# EAGLE board Keyboard _Board (EAGLE 9.7.0), part 1 of 2
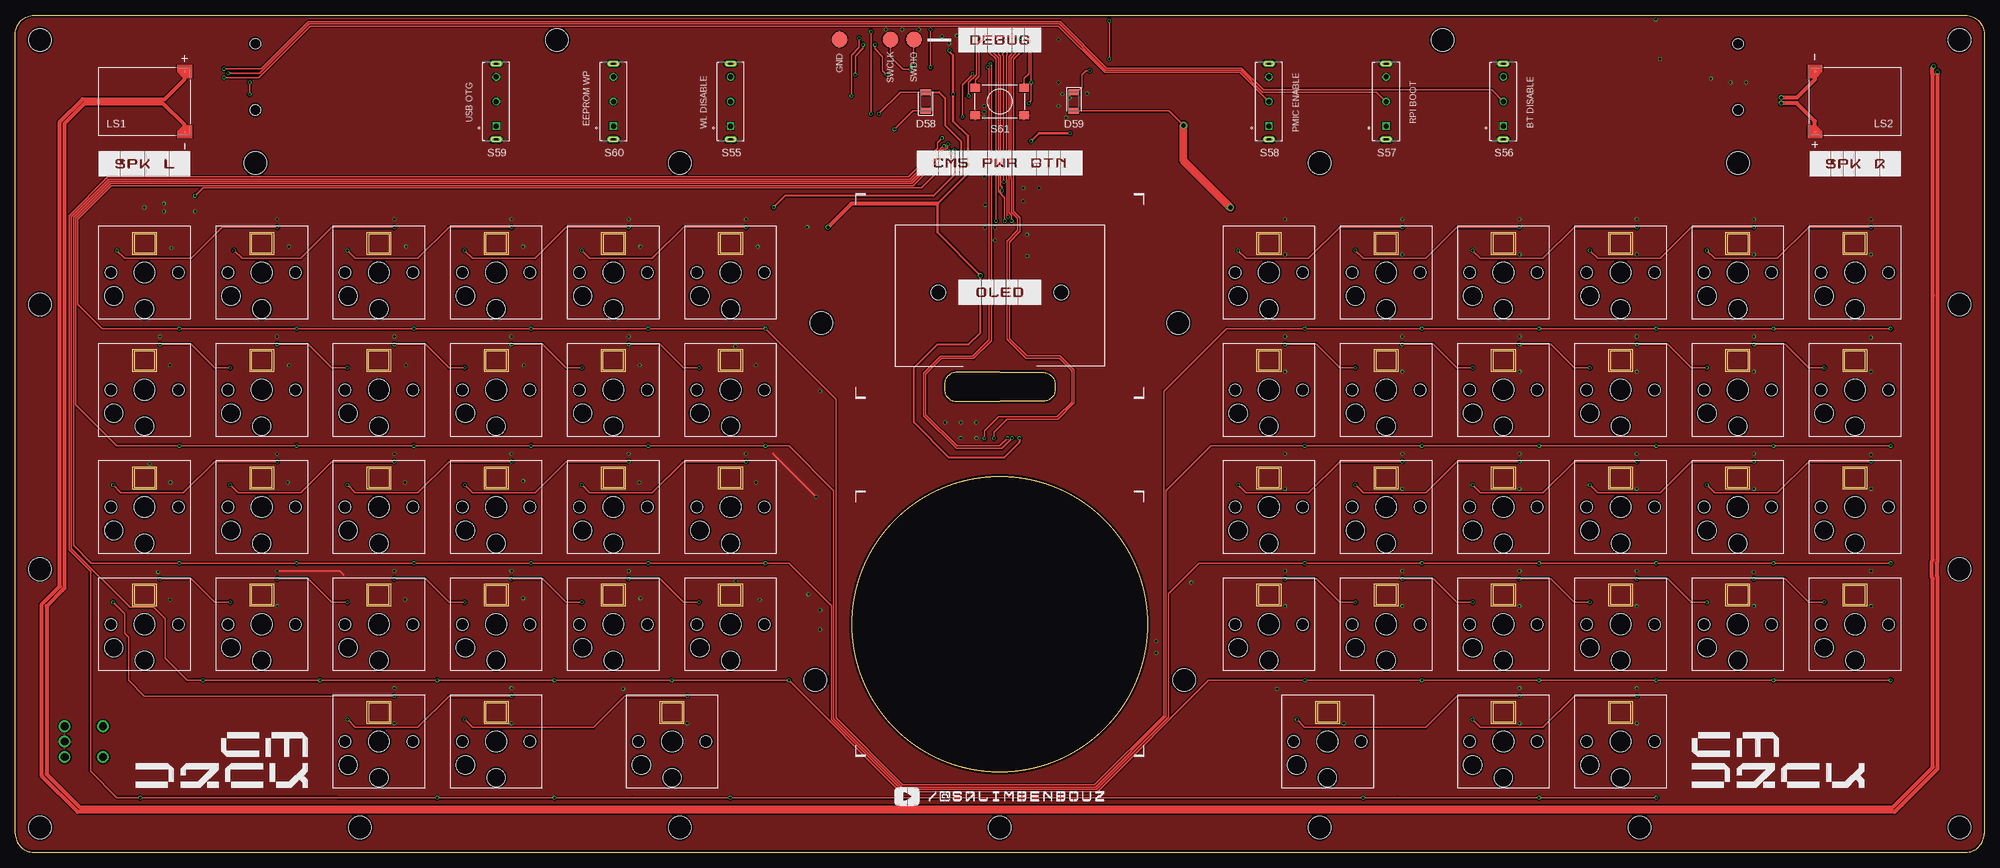
[diagram p0: board, top side]
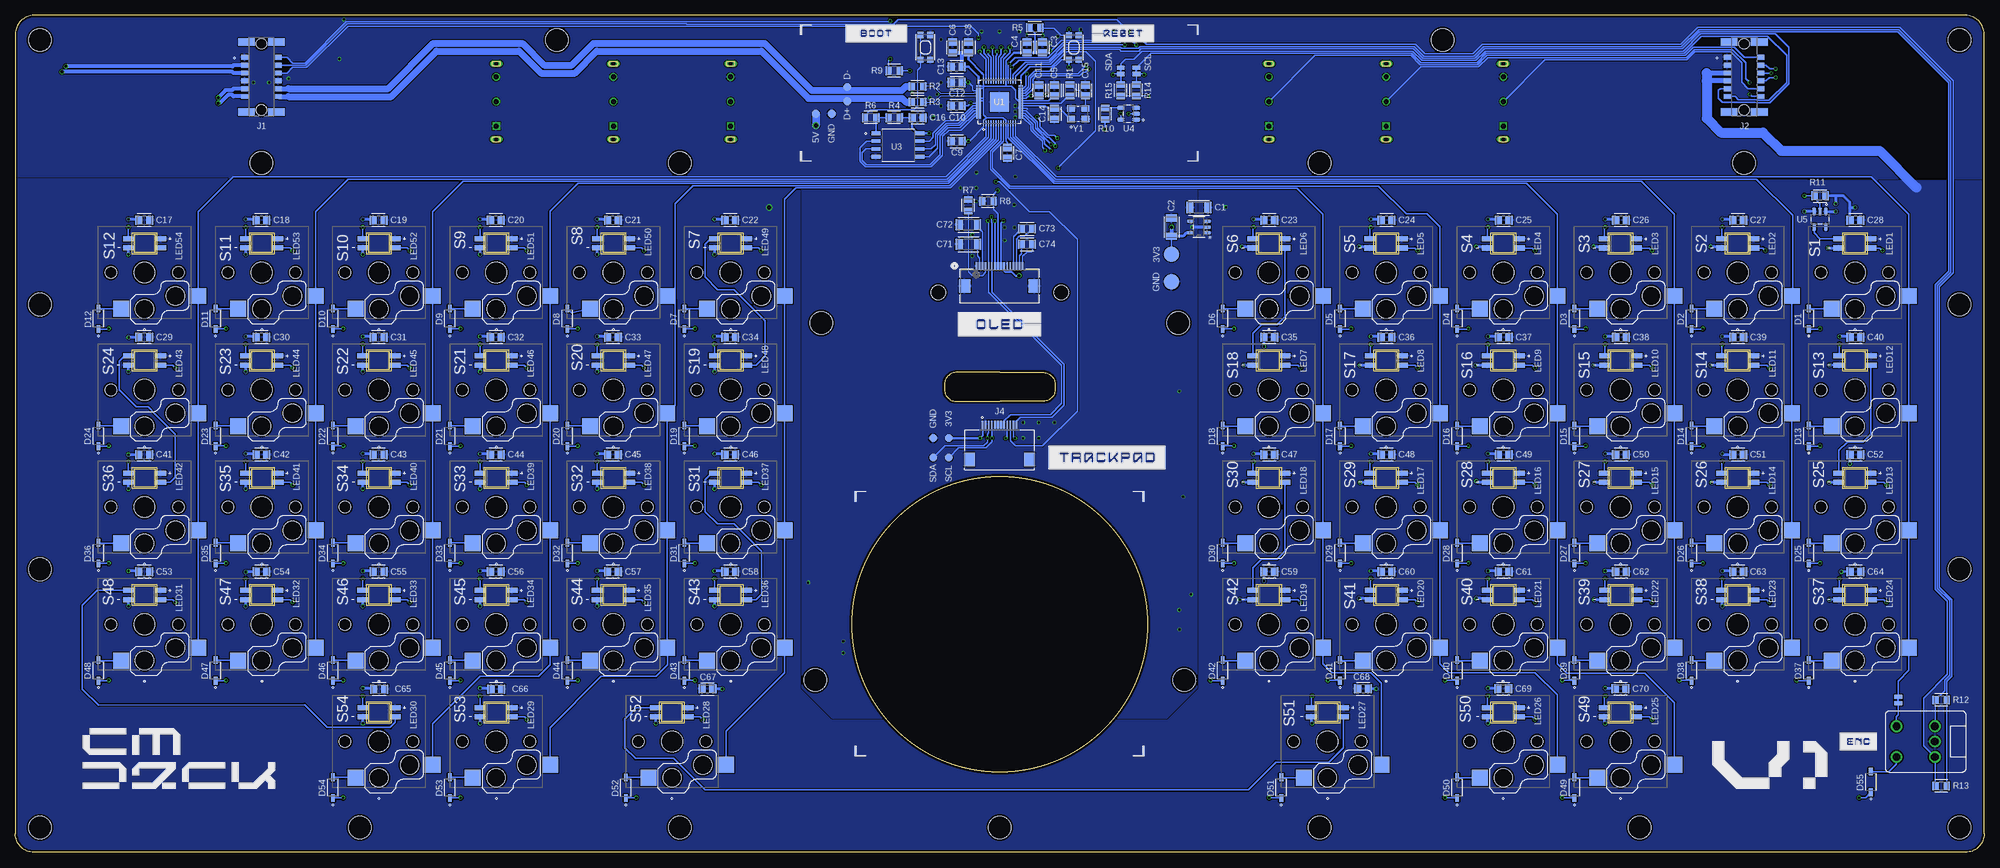
[diagram p1: board, bottom side, seen from below]

Size 320 x 136 mm. Coordinates in mm from the lower left corner, seen from the top.
Outline: 0,3 arc90 3,0 317,0 arc90 320,3 320,133 arc90 317,136 3,136 arc90 0,133 0,3
Outline: 160,78 167,78 arc-90 169,76 169,75.27 arc-90 167,73.27 160,73.27 153,73.27 arc-90 151,75.27 151,76 arc-90 153,78 160,78
Outline: circle at 160,37.05 radius 24
Copper layers (1*16): Top 0.035mm / dielectric 1.5mm / Bottom 0.035mm
Design rules "PCBWay_2L_152um-Track.dru *": minimum track width 6mil, minimum drill 0.3mm, track to track 6mil, track to pad 6mil, pad to pad 6mil, via to via 6mil, smd to smd 0mil, copper to edge 0.3mm, drill to drill 10mil, minimum pad ring 6mil, minimum via ring 0.1mm, stop-mask expansion 2mil, vias tented up to drill 999mil, thermal gap 0.2mm
Holes 3.7 mm at 4,4 316,4 160,4 130,28 131,86 108,112 39,112 108,4 56,4 4,89 4,46 212,4 264,4 190,28 189,86 212,112 280,112 316,89 316,46 88,132 232,132 4,132 316,132
Holes 2.4 mm at 170,91 150,91

## Footprints (pad centres in the part's own frame; a part is rotated, then mirrored left to right if it is on the bottom)
KMR2 = smd 1 x 1: 1 2,0.8; 2 2,-0.8; 3 -2,-0.8; 4 -2,0.8
CAPC3216X135 = smd 1.165 x 1.815: 1 -1.475,0; 2 1.475,0
CAPC2012X110 = smd 1.165 x 1.465: 1 -0.875,0; 2 0.875,0
SOD3715X135N = smd 1.21 x 0.73: A 1.68,0; C -1.68,0
LEDC3216X75N_FLAT-G = smd 0.962 x 1.712: A 1.525,0; C -1.525,0
HARWIN_M55-6001242R = smd 0.8 x 1.1: A1 -3.175,-2.75; A2 -1.905,-2.75; A3 -0.635,-2.75; A4 0.635,-2.75; A5 1.905,-2.75; A6 3.175,-2.75; B1 -3.175,2.75; B2 -1.905,2.75; B3 -0.635,2.75; B4 0.635,2.75; B5 1.905,2.75; B6 3.175,2.75 | smd 1.2 x 2.7: SH1 -5.67,-2.45; SH2 -5.67,2.45; SH3 5.67,-2.45; SH4 5.67,2.45 | hole 1.7: -5.385,0; 5.385,0
CONN16_1-1775333-6_TEC = smd 0.305 x 1.295: 1 7.5,0; 2 7,0; 3 6.5,0; 4 6,0; 5 5.5,0; 6 5,0; 7 4.5,0; 8 4,0; 9 3.5,0; 10 3,0; 11 2.5,0; 12 2,0; 13 1.5,0; 14 1,0; 15 0.5,0; 16 0,0 | smd 1.8 x 2.2: 17 -1.9,3.253; 18 9.4,3.253
AMPHENOL_F31L-1A7H1-11012 = smd 0.3 x 1.3: 1 -2.75,4.06; 2 -2.25,4.06; 3 -1.75,4.06; 4 -1.25,4.06; 5 -0.75,4.06; 6 -0.25,4.06; 7 0.25,4.06; 8 0.75,4.06; 9 1.25,4.06; 10 1.75,4.06; 11 2.25,4.06; 12 2.75,4.06 | smd 1.8 x 2.2: S1 -4.9,-1.59; S2 4.9,-1.59
SMT-JUMPER_2_NC_TRACE_NO-SILK = smd 0.66 x 1.27: 1 -0.521,0; 2 0.521,0
LED_SK6812-E = smd 1.8 x 0.82: 1 2.6,0.75; 2 2.6,-0.75; 3 -2.6,-0.75; 4 -2.6,0.75
SPKR_CMS-151135-18S-X8 = smd 0.2 x 0.2: N -4.9,-6.5; P 4.9,-6.5
RESC2012X65 = smd 1.031 x 1.42: 1 -0.919,0; 2 0.919,0
SW_5114 = smd 2.6 x 2.6: P$1 -3.8,-5.9; P$2 8.75,-3.8 | hole 3.4: 0,0 | hole 1.9: -5.5,0; 5.5,0 | hole 3: 5,-3.8; 0,-5.9
SW_SLW-1277744-3A-N-D = drill 0.8 square: 1 -4,0 | drill 0.8: 2 0,0; 3 4,0 | drill 0.7 long: SH1 -6.15,0; SH2 6.15,0
PTS645-SMT-6MM = smd 1.55 x 1.3: 1 -3.975,2.25; 2 3.975,2.25; 3 -3.975,-2.25; 4 3.975,-2.25
B2,54 = smd 2.54 x 2.54: TP 0,0
B1,27 = smd 1.27 x 1.27: TP 0,0
QFN40P700X700X90-57N = smd 0.84 x 0.2: 1 -3.435,2.6; 2 -3.435,2.2; 3 -3.435,1.8; 4 -3.435,1.4; 5 -3.435,1; 6 -3.435,0.6; 7 -3.435,0.2; 8 -3.435,-0.2; 9 -3.435,-0.6; 10 -3.435,-1; 11 -3.435,-1.4; 12 -3.435,-1.8; 13 -3.435,-2.2; 14 -3.435,-2.6; 29 3.435,-2.6; 30 3.435,-2.2; 31 3.435,-1.8; 32 3.435,-1.4; 33 3.435,-1; 34 3.435,-0.6; 35 3.435,-0.2; 36 3.435,0.2; 37 3.435,0.6; 38 3.435,1; 39 3.435,1.4; 40 3.435,1.8; 41 3.435,2.2; 42 3.435,2.6 | smd 0.2 x 0.84: 15 -2.6,-3.435; 16 -2.2,-3.435; 17 -1.8,-3.435; 18 -1.4,-3.435; 19 -1,-3.435; 20 -0.6,-3.435; 21 -0.2,-3.435; 22 0.2,-3.435; 23 0.6,-3.435; 24 1,-3.435; 25 1.4,-3.435; 26 1.8,-3.435; 27 2.2,-3.435; 28 2.6,-3.435; 43 2.6,3.435; 44 2.2,3.435; 45 1.8,3.435; 46 1.4,3.435; 47 1,3.435; 48 0.6,3.435; 49 0.2,3.435; 50 -0.2,3.435; 51 -0.6,3.435; 52 -1,3.435; 53 -1.4,3.435; 54 -1.8,3.435; 55 -2.2,3.435; 56 -2.6,3.435 | smd 3.1 x 3.1: 57 0,0
SOT_RG1_DIO = smd 1.003 x 0.508: 1 -1.353,0.95; 2 -1.353,0; 3 -1.353,-0.95; 4 1.353,-0.95; 5 1.353,0.95
SOIC127P790X216-8N = smd 1.61 x 0.58: 1 -3.605,1.905; 2 -3.605,0.635; 3 -3.605,-0.635; 4 -3.605,-1.905; 5 3.605,-1.905; 6 3.605,-0.635; 7 3.605,0.635; 8 3.605,1.905
SOT95P280X145-5N = smd 1.21 x 0.59: 1 -1.255,0.95; 2 -1.255,0; 3 -1.255,-0.95; 4 1.255,-0.95; 5 1.255,0.95
PEC09-2XXXF-SXXXX = drill 1.27: P$1 0,2.5; P$2 0,0; P$3 0,-2.5; P$4 -6.25,2.5; P$5 -6.25,-2.5
XTAL_ABM8-272-T3 = smd 1.05 x 1.3: 1 -0.875,1.15; 2 -0.875,-1.15; 3 0.875,-1.15; 4 0.875,1.15

## Placement (x,y rotation side)
BOOT  SPST-NO_SWITCH_KMR2  [KMR2]  172.09,130.81 90 bottom
C1  10uF  [CAPC3216X135]  127.64,104.78 180 bottom
C2  10uF  [CAPC3216X135]  132.08,101.6 90 bottom
C3  0.1uF  [CAPC2012X110]  153.03,130.81 90 bottom
C4  0.1uF  [CAPC2012X110]  155.57,130.81 90 bottom
C5  0.1uF  [CAPC2012X110]  151.13,123.83 90 bottom
C6  0.1uF  [CAPC2012X110]  167.64,130.81 90 bottom
C7  0.1uF  [CAPC2012X110]  158.75,113.67 270 bottom
C8  0.1uF  [CAPC2012X110]  165.1,130.81 90 bottom
C9  0.1uF  [CAPC2012X110]  167,115.57 180 bottom
C10  0.1uF  [CAPC2012X110]  167,121.31 180 bottom
C11  0.1uF  [CAPC2012X110]  153.64,123.83 90 bottom
C12  1uF  [CAPC2012X110]  167,125.09 180 bottom
C13  1uF  [CAPC2012X110]  167,127.64 180 bottom
C14  15pF  [CAPC2012X110]  151.13,120.02 90 bottom
C15  15pF  [CAPC2012X110]  146.05,123.83 270 bottom
C16  0.1uF  [CAPC2012X110]  173.35,119.38 0 bottom
C17  0.1uF  [CAPC2012X110]  299.06,102.72 0 bottom
C18  0.1uF  [CAPC2012X110]  280.01,102.72 0 bottom
C19  0.1uF  [CAPC2012X110]  260.96,102.72 0 bottom
C20  0.1uF  [CAPC2012X110]  241.91,102.72 0 bottom
C21  0.1uF  [CAPC2012X110]  222.86,102.72 0 bottom
C22  0.1uF  [CAPC2012X110]  203.81,102.72 0 bottom
C23  0.1uF  [CAPC2012X110]  116.18,102.72 0 bottom
C24  0.1uF  [CAPC2012X110]  97.13,102.72 0 bottom
C25  0.1uF  [CAPC2012X110]  78.08,102.72 0 bottom
C26  0.1uF  [CAPC2012X110]  59.03,102.72 0 bottom
C27  0.1uF  [CAPC2012X110]  39.98,102.72 0 bottom
C28  0.1uF  [CAPC2012X110]  20.93,102.72 0 bottom
C29  0.1uF  [CAPC2012X110]  299.06,83.67 0 bottom
C30  0.1uF  [CAPC2012X110]  280.01,83.67 0 bottom
C31  0.1uF  [CAPC2012X110]  260.96,83.67 0 bottom
C32  0.1uF  [CAPC2012X110]  241.91,83.67 0 bottom
C33  0.1uF  [CAPC2012X110]  222.86,83.67 0 bottom
C34  0.1uF  [CAPC2012X110]  203.81,83.67 0 bottom
C35  0.1uF  [CAPC2012X110]  116.18,83.67 0 bottom
C36  0.1uF  [CAPC2012X110]  97.13,83.67 0 bottom
C37  0.1uF  [CAPC2012X110]  78.08,83.67 0 bottom
C38  0.1uF  [CAPC2012X110]  59.03,83.67 0 bottom
C39  0.1uF  [CAPC2012X110]  39.98,83.67 0 bottom
C40  0.1uF  [CAPC2012X110]  20.93,83.67 0 bottom
C41  0.1uF  [CAPC2012X110]  299.06,64.62 0 bottom
C42  0.1uF  [CAPC2012X110]  280.01,64.62 0 bottom
C43  0.1uF  [CAPC2012X110]  260.96,64.62 0 bottom
C44  0.1uF  [CAPC2012X110]  241.91,64.62 0 bottom
C45  0.1uF  [CAPC2012X110]  222.86,64.62 0 bottom
C46  0.1uF  [CAPC2012X110]  203.81,64.62 0 bottom
C47  0.1uF  [CAPC2012X110]  116.18,64.62 0 bottom
C48  0.1uF  [CAPC2012X110]  97.13,64.62 0 bottom
C49  0.1uF  [CAPC2012X110]  78.08,64.62 0 bottom
C50  0.1uF  [CAPC2012X110]  59.03,64.62 0 bottom
C51  0.1uF  [CAPC2012X110]  39.98,64.62 0 bottom
C52  0.1uF  [CAPC2012X110]  20.93,64.62 0 bottom
C53  0.1uF  [CAPC2012X110]  299.06,45.57 0 bottom
C54  0.1uF  [CAPC2012X110]  280.01,45.57 0 bottom
C55  0.1uF  [CAPC2012X110]  260.96,45.57 0 bottom
C56  0.1uF  [CAPC2012X110]  241.91,45.57 0 bottom
C57  0.1uF  [CAPC2012X110]  222.86,45.57 0 bottom
C58  0.1uF  [CAPC2012X110]  203.81,45.57 0 bottom
C59  0.1uF  [CAPC2012X110]  116.18,45.57 0 bottom
C60  0.1uF  [CAPC2012X110]  97.13,45.57 0 bottom
C61  0.1uF  [CAPC2012X110]  78.08,45.57 0 bottom
C62  0.1uF  [CAPC2012X110]  59.03,45.57 0 bottom
C63  0.1uF  [CAPC2012X110]  39.98,45.57 0 bottom
C64  0.1uF  [CAPC2012X110]  20.93,45.57 0 bottom
C65  0.1uF  [CAPC2012X110]  260.87,26.52 0 bottom
C66  0.1uF  [CAPC2012X110]  241.82,26.52 0 bottom
C67  0.1uF  [CAPC2012X110]  207.5,26.54 180 bottom
C68  0.1uF  [CAPC2012X110]  100.95,26.57 180 bottom
C69  0.1uF  [CAPC2012X110]  78.15,26.54 0 bottom
C70  0.1uF  [CAPC2012X110]  59.1,26.54 0 bottom
C71  10uF  [CAPC3216X135]  165.1,98.81 180 bottom
C72  10uF  [CAPC3216X135]  165.1,101.98 180 bottom
C73  1uF  [CAPC2012X110]  155.57,101.34 180 bottom
C74  1uF  [CAPC2012X110]  155.57,98.81 180 bottom
D1  1N4148W  [SOD3715X135N]  28.5,86.72 90 bottom
D2  1N4148W  [SOD3715X135N]  47.55,86.72 90 bottom
D3  1N4148W  [SOD3715X135N]  66.6,86.72 90 bottom
D4  1N4148W  [SOD3715X135N]  85.65,86.72 90 bottom
D5  1N4148W  [SOD3715X135N]  104.7,86.72 90 bottom
D6  1N4148W  [SOD3715X135N]  123.75,86.72 90 bottom
D7  1N4148W  [SOD3715X135N]  211.25,86.72 90 bottom
D8  1N4148W  [SOD3715X135N]  230.3,86.72 90 bottom
D9  1N4148W  [SOD3715X135N]  249.35,86.72 90 bottom
D10  1N4148W  [SOD3715X135N]  268.4,86.72 90 bottom
D11  1N4148W  [SOD3715X135N]  287.45,86.72 90 bottom
D12  1N4148W  [SOD3715X135N]  306.5,86.72 90 bottom
D13  1N4148W  [SOD3715X135N]  28.5,67.67 90 bottom
D14  1N4148W  [SOD3715X135N]  47.55,67.67 90 bottom
D15  1N4148W  [SOD3715X135N]  66.6,67.67 90 bottom
D16  1N4148W  [SOD3715X135N]  85.65,67.67 90 bottom
D17  1N4148W  [SOD3715X135N]  104.7,67.67 90 bottom
D18  1N4148W  [SOD3715X135N]  123.75,67.67 90 bottom
D19  1N4148W  [SOD3715X135N]  211.25,67.67 90 bottom
D20  1N4148W  [SOD3715X135N]  230.3,67.67 90 bottom
D21  1N4148W  [SOD3715X135N]  249.35,67.67 90 bottom
D22  1N4148W  [SOD3715X135N]  268.4,67.67 90 bottom
D23  1N4148W  [SOD3715X135N]  287.45,67.67 90 bottom
D24  1N4148W  [SOD3715X135N]  306.5,67.67 90 bottom
D25  1N4148W  [SOD3715X135N]  28.5,48.62 90 bottom
D26  1N4148W  [SOD3715X135N]  47.55,48.62 90 bottom
D27  1N4148W  [SOD3715X135N]  66.6,48.62 90 bottom
D28  1N4148W  [SOD3715X135N]  85.65,48.62 90 bottom
D29  1N4148W  [SOD3715X135N]  104.7,48.62 90 bottom
D30  1N4148W  [SOD3715X135N]  123.75,48.62 90 bottom
D31  1N4148W  [SOD3715X135N]  211.25,48.62 90 bottom
D32  1N4148W  [SOD3715X135N]  230.3,48.62 90 bottom
D33  1N4148W  [SOD3715X135N]  249.35,48.62 90 bottom
D34  1N4148W  [SOD3715X135N]  268.4,48.62 90 bottom
D35  1N4148W  [SOD3715X135N]  287.45,48.62 90 bottom
D36  1N4148W  [SOD3715X135N]  306.5,48.62 90 bottom
D37  1N4148W  [SOD3715X135N]  28.5,29.57 90 bottom
D38  1N4148W  [SOD3715X135N]  47.55,29.57 90 bottom
D39  1N4148W  [SOD3715X135N]  66.6,29.57 90 bottom
D40  1N4148W  [SOD3715X135N]  85.65,29.57 90 bottom
D41  1N4148W  [SOD3715X135N]  104.7,29.57 90 bottom
D42  1N4148W  [SOD3715X135N]  123.75,29.57 90 bottom
D43  1N4148W  [SOD3715X135N]  211.25,29.57 90 bottom
D44  1N4148W  [SOD3715X135N]  230.3,29.57 90 bottom
D45  1N4148W  [SOD3715X135N]  249.35,29.57 90 bottom
D46  1N4148W  [SOD3715X135N]  268.4,29.57 90 bottom
D47  1N4148W  [SOD3715X135N]  287.45,29.57 90 bottom
D48  1N4148W  [SOD3715X135N]  306.5,29.57 90 bottom
D49  1N4148W  [SOD3715X135N]  66.6,10.52 90 bottom
D50  1N4148W  [SOD3715X135N]  85.65,10.52 90 bottom
D51  1N4148W  [SOD3715X135N]  114.22,10.52 90 bottom
D52  1N4148W  [SOD3715X135N]  220.75,10.49 90 bottom
D53  1N4148W  [SOD3715X135N]  249.35,10.52 90 bottom
D54  1N4148W  [SOD3715X135N]  268.4,10.52 90 bottom
D55  1N4148W  [SOD3715X135N]  18.41,11.43 90 bottom
D58  CHIP-FLAT-G_1206  [LEDC3216X75N_FLAT-G]  148,122 90 top
D59  CHIP-FLAT-G_1206  [LEDC3216X75N_FLAT-G]  172,122 270 top
J1  M55-6001242R  [HARWIN_M55-6001242R]  280,126 270 bottom
J2  M55-6001242R  [HARWIN_M55-6001242R]  39,126 270 bottom
J3  1-1775333-6CONN16_1-1775333-6_TEC  [CONN16_1-1775333-6_TEC]  156.29,95.27 180 bottom
J4  F31L-1A7H1-11012  [AMPHENOL_F31L-1A7H1-11012]  160.04,65.39 0 bottom
JP1  JUMPER-SMT_2_NC_TRACE_NO-SILK  [SMT-JUMPER_2_NC_TRACE_NO-SILK]  140.34,127 270 bottom
JP2  JUMPER-SMT_2_NC_TRACE_NO-SILK  [SMT-JUMPER_2_NC_TRACE_NO-SILK]  137.79,127 270 bottom
JP3  JUMPER-SMT_2_NC_TRACE_NO-SILK  [SMT-JUMPER_2_NC_TRACE_NO-SILK]  13.97,24.77 270 bottom
LED1  SK6812-EJ  [LED_SK6812-E]  21,98.95 0 bottom
LED2  SK6812-EJ  [LED_SK6812-E]  40.05,98.95 0 bottom
LED3  SK6812-EJ  [LED_SK6812-E]  59.1,98.95 0 bottom
LED4  SK6812-EJ  [LED_SK6812-E]  78.15,98.95 0 bottom
LED5  SK6812-EJ  [LED_SK6812-E]  97.2,98.95 0 bottom
LED6  SK6812-EJ  [LED_SK6812-E]  116.25,98.95 0 bottom
LED7  SK6812-EJ  [LED_SK6812-E]  116.23,79.91 0 bottom
LED8  SK6812-EJ  [LED_SK6812-E]  97.18,79.91 0 bottom
LED9  SK6812-EJ  [LED_SK6812-E]  78.13,79.91 0 bottom
LED10  SK6812-EJ  [LED_SK6812-E]  59.08,79.91 0 bottom
LED11  SK6812-EJ  [LED_SK6812-E]  40.03,79.91 0 bottom
LED12  SK6812-EJ  [LED_SK6812-E]  20.98,79.91 0 bottom
LED13  SK6812-EJ  [LED_SK6812-E]  21,60.85 0 bottom
LED14  SK6812-EJ  [LED_SK6812-E]  40.05,60.85 0 bottom
LED15  SK6812-EJ  [LED_SK6812-E]  59.1,60.85 0 bottom
LED16  SK6812-EJ  [LED_SK6812-E]  78.15,60.85 0 bottom
LED17  SK6812-EJ  [LED_SK6812-E]  97.2,60.85 0 bottom
LED18  SK6812-EJ  [LED_SK6812-E]  116.25,60.85 0 bottom
LED19  SK6812-EJ  [LED_SK6812-E]  116.23,41.81 0 bottom
LED20  SK6812-EJ  [LED_SK6812-E]  97.18,41.81 0 bottom
LED21  SK6812-EJ  [LED_SK6812-E]  78.13,41.81 0 bottom
LED22  SK6812-EJ  [LED_SK6812-E]  59.08,41.81 0 bottom
LED23  SK6812-EJ  [LED_SK6812-E]  40.03,41.81 0 bottom
LED24  SK6812-EJ  [LED_SK6812-E]  20.98,41.81 0 bottom
LED25  SK6812-EJ  [LED_SK6812-E]  59.1,22.75 0 bottom
LED26  SK6812-EJ  [LED_SK6812-E]  78.15,22.75 0 bottom
LED27  SK6812-EJ  [LED_SK6812-E]  106.72,22.75 0 bottom
LED28  SK6812-EJ  [LED_SK6812-E]  213.3,22.75 0 bottom
LED29  SK6812-EJ  [LED_SK6812-E]  241.83,22.75 0 bottom
LED30  SK6812-EJ  [LED_SK6812-E]  260.9,22.75 0 bottom
LED31  SK6812-EJ  [LED_SK6812-E]  299.01,41.81 0 bottom
LED32  SK6812-EJ  [LED_SK6812-E]  279.96,41.81 0 bottom
LED33  SK6812-EJ  [LED_SK6812-E]  260.91,41.81 0 bottom
LED34  SK6812-EJ  [LED_SK6812-E]  241.86,41.81 0 bottom
LED35  SK6812-EJ  [LED_SK6812-E]  222.81,41.81 0 bottom
LED36  SK6812-EJ  [LED_SK6812-E]  203.76,41.81 0 bottom
LED37  SK6812-EJ  [LED_SK6812-E]  203.73,60.85 0 bottom
LED38  SK6812-EJ  [LED_SK6812-E]  222.78,60.85 0 bottom
LED39  SK6812-EJ  [LED_SK6812-E]  241.83,60.85 0 bottom
LED40  SK6812-EJ  [LED_SK6812-E]  260.88,60.85 0 bottom
LED41  SK6812-EJ  [LED_SK6812-E]  279.93,60.85 0 bottom
LED42  SK6812-EJ  [LED_SK6812-E]  298.98,60.85 0 bottom
LED43  SK6812-EJ  [LED_SK6812-E]  299.01,79.91 0 bottom
LED44  SK6812-EJ  [LED_SK6812-E]  279.96,79.91 0 bottom
LED45  SK6812-EJ  [LED_SK6812-E]  260.91,79.91 0 bottom
LED46  SK6812-EJ  [LED_SK6812-E]  241.86,79.91 0 bottom
LED47  SK6812-EJ  [LED_SK6812-E]  222.81,79.91 0 bottom
LED48  SK6812-EJ  [LED_SK6812-E]  203.76,79.91 0 bottom
LED49  SK6812-EJ  [LED_SK6812-E]  203.73,98.96 0 bottom
LED50  SK6812-EJ  [LED_SK6812-E]  222.78,98.96 0 bottom
LED51  SK6812-EJ  [LED_SK6812-E]  241.83,98.96 0 bottom
LED52  SK6812-EJ  [LED_SK6812-E]  260.88,98.96 0 bottom
LED53  SK6812-EJ  [LED_SK6812-E]  279.93,98.96 0 bottom
LED54  SK6812-EJ  [LED_SK6812-E]  298.98,98.96 0 bottom
LS1  CMS-151135-18S-X8  [SPKR_CMS-151135-18S-X8]  21,122 90 top
LS2  CMS-151135-18S-X8  [SPKR_CMS-151135-18S-X8]  299,122 270 top
R1  1K  [RESC2012X65]  148.59,123.83 270 bottom
R2  27  [RESC2012X65]  173.35,124.46 180 bottom
R3  27  [RESC2012X65]  173.35,121.92 0 bottom
R4  10K  [RESC2012X65]  177.16,119.38 0 bottom
R5  10K  [RESC2012X65]  154.31,133.99 180 bottom
R6  1K  [RESC2012X65]  180.97,119.38 0 bottom
R7  680K  [RESC2012X65]  165.1,105.16 270 bottom
R8  5.1K  [RESC2012X65]  161.93,105.79 0 bottom
R9  2.2K  [RESC2012X65]  177.16,127 0 bottom
R10  2.2K  [RESC2012X65]  142.88,120.02 270 bottom
R11  10K  [RESC2012X65]  26.67,106.68 180 bottom
R12  10K  [RESC2012X65]  6.99,24.77 0 bottom
R13  10K  [RESC2012X65]  6.99,10.79 0 bottom
R14  10K  [RESC2012X65]  137.79,123.83 270 bottom
R15  10K  [RESC2012X65]  140.34,123.83 270 bottom
RESET  SPST-NO_SWITCH_KMR2  [KMR2]  147.96,130.79 90 bottom
S1  5114  [SW_5114]  21,94.2 0 bottom
S2  5114  [SW_5114]  40.05,94.2 0 bottom
S3  5114  [SW_5114]  59.1,94.2 0 bottom
S4  5114  [SW_5114]  78.15,94.2 0 bottom
S5  5114  [SW_5114]  97.2,94.2 0 bottom
S6  5114  [SW_5114]  116.25,94.2 0 bottom
S7  5114  [SW_5114]  203.75,94.2 0 bottom
S8  5114  [SW_5114]  222.8,94.2 0 bottom
S9  5114  [SW_5114]  241.85,94.2 0 bottom
S10  5114  [SW_5114]  260.9,94.2 0 bottom
S11  5114  [SW_5114]  279.95,94.2 0 bottom
S12  5114  [SW_5114]  299,94.2 0 bottom
S13  5114  [SW_5114]  21,75.15 0 bottom
S14  5114  [SW_5114]  40.05,75.15 0 bottom
S15  5114  [SW_5114]  59.1,75.15 0 bottom
S16  5114  [SW_5114]  78.15,75.15 0 bottom
S17  5114  [SW_5114]  97.2,75.15 0 bottom
S18  5114  [SW_5114]  116.25,75.15 0 bottom
S19  5114  [SW_5114]  203.75,75.15 0 bottom
S20  5114  [SW_5114]  222.8,75.15 0 bottom
S21  5114  [SW_5114]  241.85,75.15 0 bottom
S22  5114  [SW_5114]  260.9,75.15 0 bottom
S23  5114  [SW_5114]  279.95,75.15 0 bottom
S24  5114  [SW_5114]  299,75.15 0 bottom
S25  5114  [SW_5114]  21,56.1 0 bottom
S26  5114  [SW_5114]  40.05,56.1 0 bottom
S27  5114  [SW_5114]  59.1,56.1 0 bottom
S28  5114  [SW_5114]  78.15,56.1 0 bottom
S29  5114  [SW_5114]  97.2,56.1 0 bottom
S30  5114  [SW_5114]  116.25,56.1 0 bottom
S31  5114  [SW_5114]  203.75,56.1 0 bottom
S32  5114  [SW_5114]  222.8,56.1 0 bottom
S33  5114  [SW_5114]  241.85,56.1 0 bottom
S34  5114  [SW_5114]  260.9,56.1 0 bottom
S35  5114  [SW_5114]  279.95,56.1 0 bottom
S36  5114  [SW_5114]  299,56.1 0 bottom
S37  5114  [SW_5114]  21,37.05 0 bottom
S38  5114  [SW_5114]  40.05,37.05 0 bottom
S39  5114  [SW_5114]  59.1,37.05 0 bottom
S40  5114  [SW_5114]  78.15,37.05 0 bottom
S41  5114  [SW_5114]  97.2,37.05 0 bottom
S42  5114  [SW_5114]  116.25,37.05 0 bottom
S43  5114  [SW_5114]  203.75,37.05 0 bottom
S44  5114  [SW_5114]  222.8,37.05 0 bottom
S45  5114  [SW_5114]  241.85,37.05 0 bottom
S46  5114  [SW_5114]  260.9,37.05 0 bottom
S47  5114  [SW_5114]  279.95,37.05 0 bottom
S48  5114  [SW_5114]  299,37.05 0 bottom
S49  5114  [SW_5114]  59.1,18 0 bottom
S50  5114  [SW_5114]  78.15,18 0 bottom
S51  5114  [SW_5114]  106.72,18 0 bottom
S52  5114  [SW_5114]  213.28,18 0 bottom
S53  5114  [SW_5114]  241.85,18 0 bottom
S54  5114  [SW_5114]  260.9,18 0 bottom
S55  SLW-1277744-3A-N-D  [SW_SLW-1277744-3A-N-D]  116.25,122 90 top
S56  SLW-1277744-3A-N-D  [SW_SLW-1277744-3A-N-D]  241.85,122 90 top
S57  SLW-1277744-3A-N-D  [SW_SLW-1277744-3A-N-D]  222.8,122 90 top
S58  SLW-1277744-3A-N-D  [SW_SLW-1277744-3A-N-D]  203.75,122 90 top
S59  SLW-1277744-3A-N-D  [SW_SLW-1277744-3A-N-D]  78.15,122 90 top
S60  SLW-1277744-3A-N-D  [SW_SLW-1277744-3A-N-D]  97.2,122 90 top
S61  SPST-NO_SWITCH_PTS645-SMT-6MM  [PTS645-SMT-6MM]  160,122 0 top
TP1  TPB2,54  [B2,54]  146.05,132.08 0 top
TP2  TPB2,54  [B2,54]  142.24,132.08 0 top
TP3  TPB2,54  [B2,54]  132.08,97.16 180 bottom
TP4  TPB1,27  [B1,27]  189.87,120.02 180 bottom
TP5  TPB2,54  [B2,54]  132.08,92.71 180 bottom
TP6  TPB1,27  [B1,27]  187.32,120.02 180 bottom
TP7  TPB1,27  [B1,27]  170.81,67.31 180 bottom
TP8  TPB1,27  [B1,27]  184.78,124.33 180 bottom
TP9  TPB1,27  [B1,27]  184.78,122.05 180 bottom
TP10  TPB1,27  [B1,27]  168.28,64.14 180 bottom
TP11  TPB1,27  [B1,27]  170.81,64.14 180 bottom
TP12  TPB1,27  [B1,27]  168.28,67.31 180 bottom
TP13  TPB2,54  [B2,54]  133.99,132.08 0 top
U1  SC0914(13)  [QFN40P700X700X90-57N]  160.02,121.92 90 bottom
U2  AP2112K-3.3TRG1SOT_RG1_DIO  [SOT_RG1_DIO]  127.64,101.6 180 bottom
U3  W25Q128JVSIM_TR  [SOIC127P790X216-8N]  176.53,114.94 0 bottom
U4  SN74AHCT1G125DBVR  [SOT95P280X145-5N]  139.06,120.02 180 bottom
U5  SN74AHCT1G125DBVR  [SOT95P280X145-5N]  26.67,102.87 270 bottom
U$1  PEC09-2120F-S0012  [PEC09-2XXXF-SXXXX]  8,18 0 bottom
Y1  ABM8-272-T3  [XTAL_ABM8-272-T3]  147.24,120.02 90 bottom

## Library data of the parts
BOOT RESET = Switch; CATEGORY: Switches; DATASHEET: https://www.ckswitches.com/media/1479/kmr2.pdf; DESCRIPTION: Tactile Switch SPST-NO Top Actuated Surface Mount; MANUFACTURER: C&K; MPN: KMR211G LFS; OPERATING_TEMPERATURE: -40°C ~ 85°C; PACKAGE_SIZE: NA; PACKAGE_TYPE: Surface Mount; PART_STATUS: Active; ROHS: Compliant; SERIES: KMR2; SUBCATEGORY: Tactile Switches; TYPE: SPST-NO
C1 C2 C71 C72 = Capacitor; CATEGORY: Capacitor; PACKAGE_SIZE: 1206; PACKAGE_TYPE: Surface Mount; SUBCATEGORY: Ceramic Capacitors; TYPE: MLCC
C3-C70 C73 C74 = Capacitor; CATEGORY: Capacitor; PACKAGE_SIZE: 0805; PACKAGE_TYPE: Surface Mount; SUBCATEGORY: Ceramic Capacitors; TYPE: MLCC
D1-D55 = 1N4148W; AVAILABILITY: In Stock; CHECK_PRICES: https://www.snapeda.com/parts/1N4148W-7-F/Diodes+Inc./view-part/?ref=eda; DESCRIPTION: Diode Switching 150mA 100V 400mW SOD123 | Diodes Inc 1N4148W-7-F; MF: Diodes Inc.; MP: 1N4148W-7-F; PACKAGE: SOD-123 Fairchild Semiconductor; PRICE: None; PURCHASE-URL: https://pricing.snapeda.com/search?q=1N4148W-7-F&ref=eda; SNAPEDA_LINK: https://www.snapeda.com/parts/1N4148W-7-F/Diodes+Inc./view-part/?ref=snap
D58 D59 = LED; CATEGORY: LED; COLOR: Green; DESCRIPTION: Green LED Indication 1206 (3216 Metric); PACKAGE_SIZE: 1206; PACKAGE_TYPE: Surface Mount; SUBCATEGORY: Chip LED; TYPE: Square with Flat Top
J1 J2 = M55-6001242R; MANUFACTURER: Harwin; MAXIMUM_PACKAGE_HEIGHT: 7.5mm; PARTREV: 8; STANDARD: Manufacturer Recommendations
J3 = 1_1775333_6; COPYRIGHT: Copyright (C) 2025 Ultra Librarian. All rights reserved.; DATASHEET: https://www.te.com/commerce/DocumentDelivery/DDEController?Action=srchrtrv&DocNm=108-57590&DocType=Specification+Or+Standard&DocLang=English&PartCntxt=5-1775333-4&DocFormat=tif; DESCRIPTION: ZIF FPC 0.5, 2H, 16P; MANUFACTURER_NAME: TE Connectivity; MANUFACTURER_PART_NUMBER: 1-1775333-6; TYPE: Receptacle
J4 = F31L-1A7H1-11012; MANUFACTURER: Amphenol ICC; MAXIMUM_PACKAGE_HEIGHT: 2.55mm; PARTREV: I; STANDARD: Manufacturer recommendations
JP1-JP3 = SparkFun-Jumpers
LED1-LED54 = SK6812-E; AVAILABILITY: Not in stock; CHECK_PRICES: https://www.snapeda.com/parts/SK6812-E/DONGGUANG+OPSCO+OPTOELECTRONICS+CO.%252C+LTD/view-part/?ref=eda; DESCRIPTION: SK6812MINI-E is a smart LED control circuit and light emitting circuit in one controlled LED source, which has the shape of a 3528 LED chip.; MF: DONGGUANG OPSCO OPTOELECTRONICS CO., LTD; MP: SK6812-E; PACKAGE: Package; PRICE: None; SNAPEDA_LINK: https://www.snapeda.com/parts/SK6812-E/DONGGUANG+OPSCO+OPTOELECTRONICS+CO.%252C+LTD/view-part/?ref=snap
LS1 LS2 = CMS-151135-18S-X8; MANUFACTURER: CUI Devices; MAXIMUM_PACKAGE_HEIGHT: 3.2mm; PARTREV: 1.0; STANDARD: Manufacturer Recommendations
R1-R15 = Resistor; CATEGORY: Resistors; DESCRIPTION: Chip Resistor 2.00 X 1.25 X 0.65 mm body 0805(2012-METRIC) Package; PACKAGE_SIZE: 0805; PACKAGE_TYPE: Surface Mount
S1-S54 = 5114; AVAILABILITY: In Stock; CHECK_PRICES: https://www.snapeda.com/parts/5114/Adafruit+Industries/view-part/?ref=eda; DESCRIPTION: Pushbutton Switch SPST-NO Keyswitch Through Hole; MF: Adafruit Industries LLC; MP: 5114; PACKAGE: None; PRICE: None; SNAPEDA_LINK: https://www.snapeda.com/parts/5114/Adafruit+Industries/view-part/?ref=snap
S55-S60 = SLW-1277744-3A-N-D; MANUFACTURER: Same Sky; MAXIMUM_PACKAGE_HEIGHT: 8.0mm; PARTREV: 1.01; STANDARD: Manufacturer Recommendations
S61 = Switch; CATEGORY: Switches; DATASHEET: https://www.ckswitches.com/media/1471/pts645.pdf; DESCRIPTION: Tactile Switch SPST-NO Top Actuated Surface Mount; MANUFACTURER: C&K; MPN: PTS645SM43SMTR92 LFS; OPERATING_TEMPERATURE: -20°C ~ 85°C; PACKAGE_SIZE: 6mm; PACKAGE_TYPE: Surface Mount; PART_STATUS: Active; ROHS: Compliant; SERIES: PTS645; SUBCATEGORY: Tactile Switches; TYPE: SPST-NO
TP1-TP13 = testpad
U1 = SC0914_13_; MANUFACTURER: Raspberry Pi; MAXIMUM_PACKAGE_HEIGHT: 0.90 mm; PARTREV: 2.2; STANDARD: IPC 7351B
U2 = 2025-06-23_23-29-35_Library; COPYRIGHT: Copyright (C) 2025 Ultra Librarian. All rights reserved.; MANUFACTURER_PART_NUMBER: AP2112K-3.3TRG1; MFR_NAME: Diodes Inc
U3 = W25Q128JVSIM_TR; AVAILABILITY: In Stock; CHECK_PRICES: https://www.snapeda.com/parts/W25Q128JVSIM%20TR/Winbond/view-part/?ref=eda; DESCRIPTION: FLASH - NOR Memory IC 128Mb (16M x 8) SPI - Quad I/O, QPI, DTR 133 MHz 8-SOIC; MF: Winbond Electronics; MP: W25Q128JVSIM TR; PACKAGE: SOIC-8 Winbond Electronics; PRICE: None; SNAPEDA_LINK: https://www.snapeda.com/parts/W25Q128JVSIM%20TR/Winbond/view-part/?ref=snap
U4 U5 = SN74AHCT1G125DBVR
U$1 = PEC09
Y1 = ABM8-272-T3; CREATOR: DIZAR; MANUFACTURER: ABRACON; MAXIMUM_PACKAGE_HEIGHT: 0.8mm; PARTREV: 07-29-20; STANDARD: Manufacturer Recommendations

## Nets
1V1: C10.1 C11.1 C12.1 U1.23 U1.45 U1.50
3V3: C2.1 C3.1 C4.1 C5.1 C6.1 C7.1 C8.1 C9.1 C13.1 C16.1 J3.10 J3.12 J4.1 R4.2 R5.2 R12.2 R13.2 R14.2 R15.2 TP3.TP TP12.TP U1.1 U1.10 U1.22 U1.33 U1.42 U1.43 U1.44 U1.48 U1.49 U2.5 U3.8
5V: C1.1 C17.2 C18.2 C19.2 C20.2 C21.2 C22.2 C23.2 C24.2 C25.2 C26.2 C27.2 C28.2 C29.2 C30.2 C31.2 C32.2 C33.2 C34.2 C35.2 C36.2 C37.2 C38.2 C39.2 C40.2 C41.2 C42.2 C43.2 C44.2 C45.2 C46.2 C47.2 C48.2 C49.2 C50.2 C51.2 C52.2 C53.2 C54.2 C55.2 C56.2 C57.2 C58.2 C59.2 C60.2 C61.2 C62.2 C63.2 C64.2 C65.2 C66.2 C67.2 C68.2 C69.2 C70.2 D58.A D59.A J2.A3 J2.A4 LED1.1 LED2.1 LED3.1 LED4.1 LED5.1 LED6.1 LED7.1 LED8.1 LED9.1 LED10.1 LED11.1 LED12.1 LED13.1 LED14.1 LED15.1 LED16.1 LED17.1 LED18.1 LED19.1 LED20.1 LED21.1 LED22.1 LED23.1 LED24.1 LED25.1 LED26.1 LED27.1 LED28.1 LED29.1 LED30.1 LED31.1 LED32.1 LED33.1 LED34.1 LED35.1 LED36.1 LED37.1 LED38.1 LED39.1 LED40.1 LED41.1 LED42.1 LED43.1 LED44.1 LED45.1 LED46.1 LED47.1 LED48.1 LED49.1 LED50.1 LED51.1 LED52.1 LED53.1 LED54.1 TP4.TP U2.1 U2.3 U4.5 U5.5
!BOOT: BOOT.1 BOOT.4 R6.1
!RESET: R5.1 RESET.1 RESET.4 U1.26
!RPIBOOT: J2.B3 S57.2
BT_!DISABLE: J2.B2 S56.2
CM5_GPIO2: J2.A5 JP1.1
CM5_GPIO3: J2.A6 JP2.1
COL0: JP3.1 S1.P$2 S13.P$2 S25.P$2 S37.P$2 U1.14
COL1: S2.P$2 S14.P$2 S26.P$2 S38.P$2 U1.13
COL2: S3.P$2 S15.P$2 S27.P$2 S39.P$2 U1.12
COL3: S4.P$2 S16.P$2 S28.P$2 S40.P$2 S49.P$2 U1.11
COL4: S5.P$2 S17.P$2 S29.P$2 S41.P$2 S50.P$2 U1.9
COL5: S6.P$2 S18.P$2 S30.P$2 S42.P$2 S51.P$2 U1.8
COL6: S7.P$2 S19.P$2 S31.P$2 S43.P$2 S52.P$2 U1.7
COL7: S8.P$2 S20.P$2 S32.P$2 S44.P$2 S53.P$2 U1.6
COL8: S9.P$2 S21.P$2 S33.P$2 S45.P$2 S54.P$2 U1.5
COL9: S10.P$2 S22.P$2 S34.P$2 S46.P$2 U1.4
COL10: S11.P$2 S23.P$2 S35.P$2 S47.P$2 U1.3
COL11: S12.P$2 S24.P$2 S36.P$2 S48.P$2 U1.2
EEPROM_!WP: J2.B6 S60.2
GND: BOOT.2 BOOT.3 C1.2 C2.2 C3.2 C4.2 C5.2 C6.2 C7.2 C8.2 C9.2 C10.2 C11.2 C12.2 C13.2 C14.1 C15.1 C16.2 C17.1 C18.1 C19.1 C20.1 C21.1 C22.1 C23.1 C24.1 C25.1 C26.1 C27.1 C28.1 C29.1 C30.1 C31.1 C32.1 C33.1 C34.1 C35.1 C36.1 C37.1 C38.1 C39.1 C40.1 C41.1 C42.1 C43.1 C44.1 C45.1 C46.1 C47.1 C48.1 C49.1 C50.1 C51.1 C52.1 C53.1 C54.1 C55.1 C56.1 C57.1 C58.1 C59.1 C60.1 C61.1 C62.1 C63.1 C64.1 C65.1 C66.1 C67.1 C68.1 C69.1 C70.1 C71.2 C72.2 J1.A1 J1.A4 J1.B4 J2.A1 J2.A2 J3.1 J3.11 J3.17 J3.18 J4.2 LED1.3 LED2.3 LED3.3 LED4.3 LED5.3 LED6.3 LED7.3 LED8.3 LED9.3 LED10.3 LED11.3 LED12.3 LED13.3 LED14.3 LED15.3 LED16.3 LED17.3 LED18.3 LED19.3 LED20.3 LED21.3 LED22.3 LED23.3 LED24.3 LED25.3 LED26.3 LED27.3 LED28.3 LED29.3 LED30.3 LED31.3 LED32.3 LED33.3 LED34.3 LED35.3 LED36.3 LED37.3 LED38.3 LED39.3 LED40.3 LED41.3 LED42.3 LED43.3 LED44.3 LED45.3 LED46.3 LED47.3 LED48.3 LED49.3 LED50.3 LED51.3 LED52.3 LED53.3 LED54.3 R7.1 R8.1 R11.1 RESET.2 RESET.3 S55.1 S56.1 S57.3 S58.3 S59.3 S60.3 S61.3 S61.4 TP5.TP TP6.TP TP7.TP TP13.TP U1.19 U1.57 U2.2 U3.4 U4.1 U4.3 U5.1 U5.3 U$1.P$2 Y1.2 Y1.4
LED_!ACTIVITY: J1.B1 R9.1
LED_!PWR: J1.B2 U4.2
MISO: J4.11 U1.40
MOSI: J3.5 J4.8 U1.39
N$1: D1.A S1.P$1
N$2: C15.2 R1.1 Y1.3
N$3: D59.C R9.2
N$4: LED8.2 LED9.4
N$5: LED24.2 LED25.4
N$6: D2.A S2.P$1
N$7: D3.A S3.P$1
N$8: D4.A S4.P$1
N$9: D5.A S5.P$1
N$10: D6.A S6.P$1
N$11: D7.A S7.P$1
N$12: R4.1 R6.2 U3.1
N$13: D8.A S8.P$1
N$14: D9.A S9.P$1
N$15: D10.A S10.P$1
N$16: D11.A S11.P$1
N$17: D12.A S12.P$1
N$18: D13.A S13.P$1
N$19: D14.A S14.P$1
N$20: D15.A S15.P$1
N$21: D16.A S16.P$1
N$22: D17.A S17.P$1
N$23: D18.A S18.P$1
N$24: D19.A S19.P$1
N$25: D20.A S20.P$1
N$26: D21.A S21.P$1
N$27: D22.A S22.P$1
N$28: D23.A S23.P$1
N$29: D24.A S24.P$1
N$30: D25.A S25.P$1
N$31: D26.A S26.P$1
N$32: D27.A S27.P$1
N$33: D28.A S28.P$1
N$34: D29.A S29.P$1
N$35: D30.A S30.P$1
N$36: D31.A S31.P$1
N$37: D32.A S32.P$1
N$38: D33.A S33.P$1
N$39: D34.A S34.P$1
N$40: D35.A S35.P$1
N$41: D36.A S36.P$1
N$42: D37.A S37.P$1
N$43: D38.A S38.P$1
N$44: D39.A S39.P$1
N$45: D40.A S40.P$1
N$46: D41.A S41.P$1
N$47: D42.A S42.P$1
N$48: D43.A S43.P$1
N$49: D44.A S44.P$1
N$50: D45.A S45.P$1
N$51: D46.A S46.P$1
N$52: D47.A S47.P$1
N$53: D48.A S48.P$1
N$54: D49.A S49.P$1
N$55: D50.A S50.P$1
N$56: D51.A S51.P$1
N$57: D52.A S52.P$1
N$58: D53.A S53.P$1
N$59: D54.A S54.P$1
N$60: C71.1 J3.2
N$61: C72.1 J3.3
N$62: LED1.2 LED2.4
N$63: J3.4 R7.2
N$64: C73.2 J3.13
N$65: LED17.2 LED18.4
N$66: C73.1 J3.14
N$67: LED3.2 LED4.4
N$68: LED2.2 LED3.4
N$69: C74.2 J3.15
N$70: C74.1 J3.16
N$71: D58.C R10.2
N$72: R10.1 U4.4
N$73: LED5.2 LED6.4
N$74: LED19.2 LED20.4
N$75: LED40.2 LED41.4
N$76: LED18.2 LED19.4
N$80: LED7.2 LED8.4
N$81: LED6.2 LED7.4
N$82: LED4.2 LED5.4
N$87: LED9.2 LED10.4
N$88: LED21.2 LED22.4
N$92: LED11.2 LED12.4
N$93: LED10.2 LED11.4
N$98: LED13.2 LED14.4
N$99: LED23.2 LED24.4
N$101: LED22.2 LED23.4
N$103: LED15.2 LED16.4
N$104: LED14.2 LED15.4
N$105: LED12.2 LED13.4
N$106: LED20.2 LED21.4
N$109: LED25.2 LED26.4
N$112: LED27.2 LED28.4
N$113: LED26.2 LED27.4
N$116: LED29.2 LED30.4
N$119: LED31.2 LED32.4
N$120: LED30.2 LED31.4
N$121: LED28.2 LED29.4
N$122: LED16.2 LED17.4
N$125: LED33.2 LED34.4
N$128: LED35.2 LED36.4
N$129: LED34.2 LED35.4
N$132: LED37.2 LED38.4
N$136: LED39.2 LED40.4
N$137: LED38.2 LED39.4
N$138: LED36.2 LED37.4
N$141: LED41.2 LED42.4
N$144: LED43.2 LED44.4
N$145: LED42.2 LED43.4
N$148: LED45.2 LED46.4
N$151: LED47.2 LED48.4
N$152: LED46.2 LED47.4
N$153: LED44.2 LED45.4
N$154: LED32.2 LED33.4
N$157: LED49.2 LED50.4
N$160: LED51.2 LED52.4
N$161: LED50.2 LED51.4
N$164: LED53.2 LED54.4
N$165: LED48.2 LED49.4
N$170: LED52.2 LED53.4
OLED_CS: J3.9 U1.34
OLED_DC: J3.7 U1.35
OLED_RST: J3.8 R8.2 U1.36
PMIC_ENABLE: J2.B4 S58.2
PWR_BUTTON: J1.B3 S61.1 S61.2
QSPI_SCLK: U1.52 U3.6
QSPI_SD0: U1.53 U3.5
QSPI_SD1: U1.55 U3.2
QSPI_SD2: U1.54 U3.3
QSPI_SD3: U1.51 U3.7
RGB: R11.2 U1.28 U5.2
RGB_5V: LED1.4 U5.4
ROT_A: R13.1 U1.29 U$1.P$3
ROT_B: R12.1 U1.30 U$1.P$1
ROT_S1: JP3.2 U$1.P$4
ROT_S2: D55.A U$1.P$5
ROW0: D1.C D2.C D3.C D4.C D5.C D6.C D7.C D8.C D9.C D10.C D11.C D12.C U1.15
ROW1: D13.C D14.C D15.C D16.C D17.C D18.C D19.C D20.C D21.C D22.C D23.C D24.C U1.16
ROW2: D25.C D26.C D27.C D28.C D29.C D30.C D31.C D32.C D33.C D34.C D35.C D36.C U1.17
ROW3: D37.C D38.C D39.C D40.C D41.C D42.C D43.C D44.C D45.C D46.C D47.C D48.C U1.18
ROW4: D49.C D50.C D51.C D52.C D53.C D54.C D55.C U1.27
SCK: J3.6 J4.12 U1.38
SCL: J4.4 JP2.2 R14.1 TP10.TP U1.32
SDA: J4.3 JP1.2 R15.1 TP11.TP U1.31
SPK_L_N [Audio]: J1.A2 LS1.N
SPK_L_P [Audio]: J1.A3 LS1.P
SPK_R_N [Audio]: J1.A5 LS2.N
SPK_R_P [Audio]: J1.A6 LS2.P
SWCLK: TP2.TP U1.24
SWDIO: TP1.TP U1.25
TRACKPAD_CS: J4.10 U1.37
TRACKPAD_DR: J4.9 U1.41
USB_D_N: R2.1 U1.46
USB_D_P: R3.2 U1.47
USB_N [90 ohm]: J1.B5 R2.2 TP8.TP
USB_OTG_ID: J2.B5 S59.2
USB_P [90 ohm]: J1.B6 R3.1 TP9.TP
WL_!DISABLE: J2.B1 S55.2
XIN: C14.2 U1.20 Y1.1
XOUT: R1.2 U1.21